# EAGLE board lampuIOT (EAGLE 9.5.2)
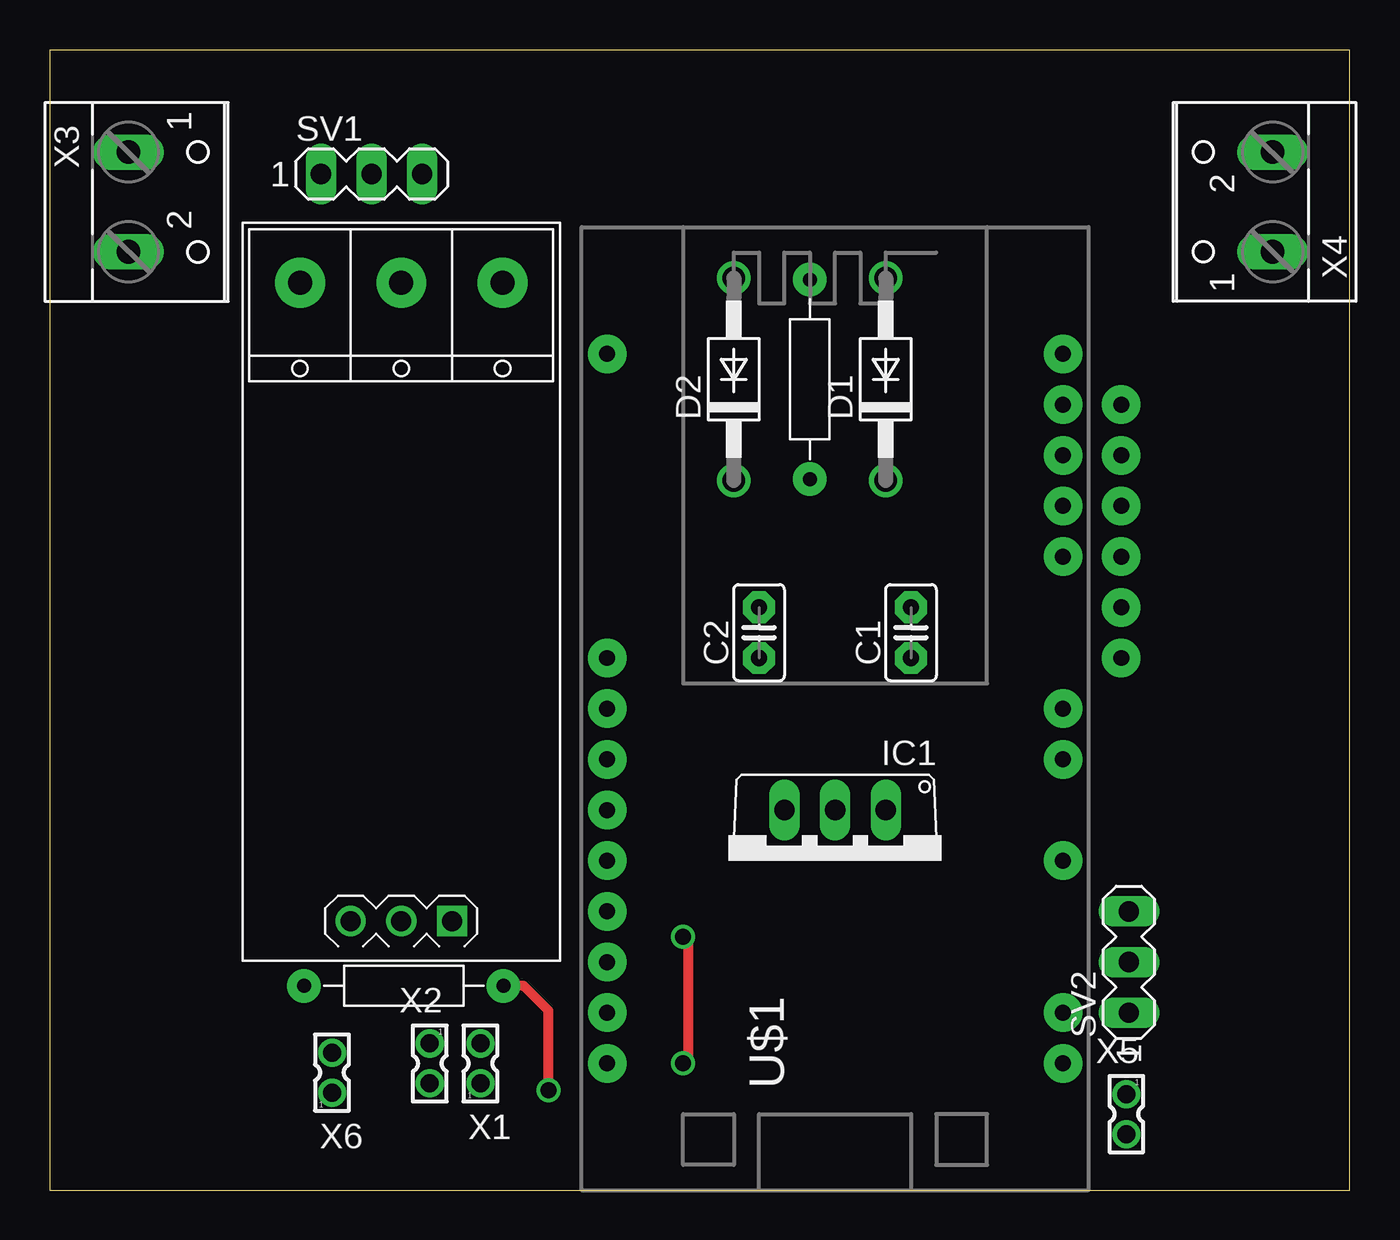
[diagram p0: board, top side]
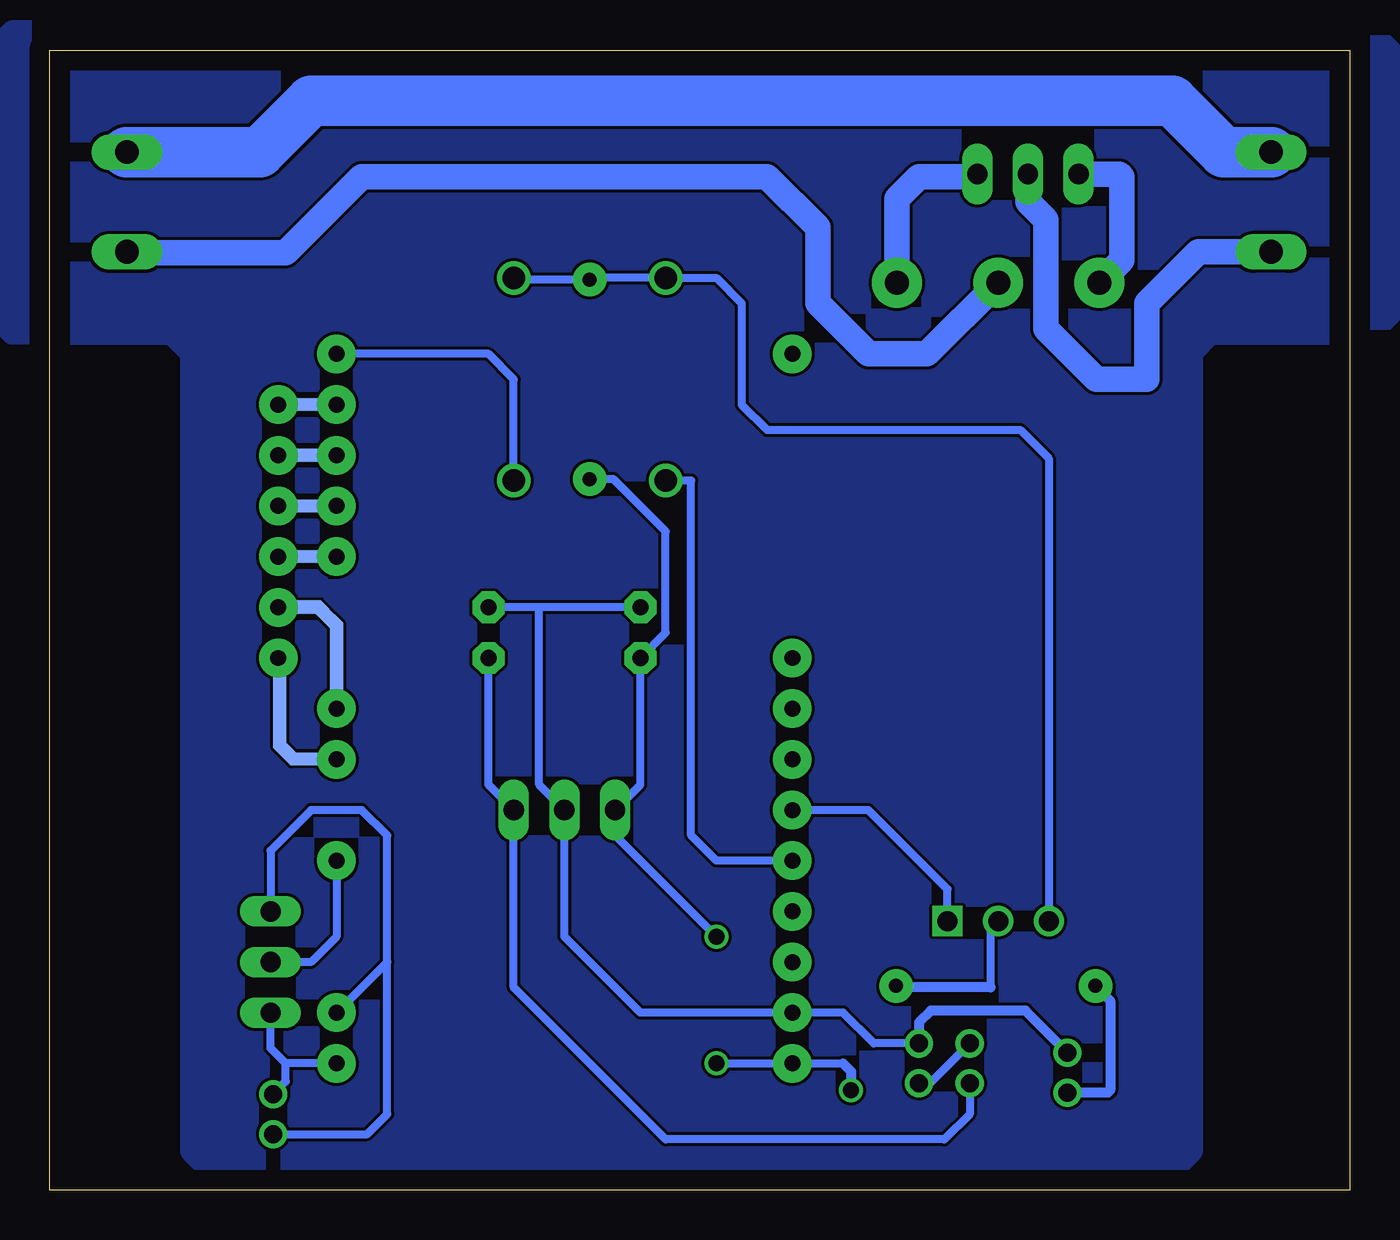
[diagram p1: board, bottom side, seen from below]

Size 65.17 x 57.14 mm. Coordinates in mm from the lower left corner, seen from the top.
Outline: 0,0 65.17,0 65.17,57.14 0,57.14 0,0
Copper layers (1*16): Top 0.035mm / dielectric 1.5mm / Bottom 0.035mm
Design rules "default": minimum track width 6mil, minimum drill 0.35mm, track to track 6mil, track to pad 6mil, pad to pad 6mil, via to via 6mil, smd to smd 6mil, copper to edge 40mil, drill to drill 6mil, minimum pad ring 10mil, minimum via ring 8mil, stop-mask expansion 4mil, vias tented up to drill 0mil, thermal gap 10mil

## Footprints (pad centres in the part's own frame; a part is rotated, then mirrored left to right if it is on the bottom)
C2.5-2 = drill 0.813 pad 1.6 octagon: 1 -1.27,0; 2 1.27,0
DO41-10 = drill 1.118: A 5.08,0; C -5.08,0
TO220V = drill 1.016 long: 1 -2.54,-2.54; 2 0,-2.54; 3 2.54,-2.54
RESISTOR = drill 0.7 pad 1.676: P$1 5,0; P$2 -5,0
RELAY1CH = drill 1 square: J1.1 -14.2,-2.89 | drill 1: J1.2 -14.2,-0.35; J1.3 -14.2,2.19 | drill 1.2 pad 2.5: P1.1 17.8,-5.43; P1.2 17.8,-0.35; P1.3 17.8,4.73
MA03-1 = drill 1.016 long: 1 -2.54,0; 2 0,0; 3 2.54,0
ESP12E_DEVKIT = drill 0.8 pad 1.93: 3V3@0 -11.43,-7.62; 3V3@2 11.43,-17.78; 3V3@3 14.351,5.08; AD0 -11.43,17.78; CLK -11.43,-2.54; CMD -11.43,2.54; D0 11.43,17.78; D1 11.43,15.24; D2 11.43,12.7; D3 11.43,10.16; D4 11.43,7.62; D5 11.43,0; D6 11.43,-2.54; D8 11.43,-7.62; D9 14.351,15.24; D10 14.351,12.7; D11 14.351,10.16; D12 14.351,7.62; EN -11.43,-10.16; GND@0 -11.43,-5.08; GND@1 -11.43,-15.24; GND@3 11.43,-15.24; GND@4 14.351,2.54; RST -11.43,-12.7; SD0 -11.43,0; VIN -11.43,-17.78 | smd 1.27 x 0.635 bottom: P$2 12.7,15.24; P$3 12.7,12.7; P$4 12.7,10.16; P$5 12.7,7.62; P$7 13.97,15.24; P$8 13.97,12.7; P$9 13.97,10.16; P$10 13.97,7.62; P$14 13.26,5.08; P$16 12.89,5.08; P$19 12.87,5.11; P$20 13.36,5.11; P$21 11.82,-2.53; P$22 13.06,-2.53 | smd 0.635 x 1.27 bottom: P$11 11.42,1.18; P$12 11.42,2.41; P$13 11.42,3.65; P$24 14.28,-1.32; P$25 14.28,-0.05; P$26 14.28,1.22 | smd 1.27 x 0.635 rotated 45 bottom: P$15 11.78,4.52; P$17 11.77,4.51; P$18 12.01,4.75; P$23 13.92,-2.18
332-02 = drill 0.9 pad 1.27: 1 0,-1; 2 0,1
W237-102 = drill 1.194 long: 1 -2.5,-1.27; 2 2.5,-1.27

## Placement (x,y rotation side)
C1  [C2.5-2]  43.18,27.94 90 top
C2  [C2.5-2]  35.56,27.94 90 top
D1  1N4004  [DO41-10]  41.91,40.64 90 top
D2  1N4004  [DO41-10]  34.29,40.64 90 top
IC1  7805TV  [TO220V]  39.37,16.51 180 top
R  RESISTOR  [RESISTOR]  38.1,40.64 270 top
R1  RESISTOR  [RESISTOR]  17.75,10.24 0 top
RELAY  RELAY1CH  [RELAY1CH]  17.27,27.69 90 top
SV1  [MA03-1]  16.13,50.93 0 top
SV2  [MA03-1]  54.1,11.43 90 top
U$1  ESP12E_DEVKIT  [ESP12E_DEVKIT]  39.37,24.13 0 top
X1  332-02  [332-02]  21.59,6.35 0 top
X2  332-02  [332-02]  19.05,6.35 180 top
X3  [W237-102]  5.21,49.53 270 top
X4  [W237-102]  60.04,49.53 90 top
X5  332-02  [332-02]  53.98,3.81 180 top
X6  332-02  [332-02]  14.14,5.89 0 top

## Library data of the parts
C1 C2 = capacitor-wima
D1 D2 = diode
IC1 = linear
R R1 = resistor
RELAY = nodemcu_lolin
SV1 SV2 = con-lstb; OC_FARNELL: unknown; OC_NEWARK: unknown
U$1 = node_lampuIOT
X1 X2 X5 X6 = con-garry
X3 X4 = con-wago-500; MPN: 237-102; OC_FARNELL: unknown; OC_NEWARK: 70K9898

## Nets
3V31: D2.C U$1.3V3@0
3V32: SV2.1 U$1.3V3@2 X5.1
5V: C2.1 IC1.3 R1.P$1 R.P$1 RELAY.J1.2 U$1.VIN
BATTERY: X1.1 X2.1
COM: RELAY.P1.2 X4.1
DHT: SV2.2 U$1.D8
GND: C1.2 C2.2 IC1.2 U$1.GND@1 X1.2 X6.2
GND1: RELAY.J1.1 U$1.GND@0
GND2: SV2.3 U$1.GND@3 X5.2
IN1: D1.C U$1.D0
N$1: X3.1 X4.2
N$2: R1.P$2 X6.1
NC: RELAY.P1.1 SV1.3
NO: RELAY.P1.3 SV1.1
OUT1: D1.A D2.A R.P$2 RELAY.J1.3
OUT2: SV1.2 X3.2
VBAT: C1.1 IC1.1 X2.2

## Tracks (layer width: path | path; a pad name or v marks a point on that pad's centre or on a via)
3V31
  Bottom 0.406: U$1.3V3@0 31.75,16.51 33.02,17.78 33.02,35.56 D2.C
3V32
  Bottom 0.406: U$1.3V3@2 53.34,6.35 | 53.34,6.35 54.1,7.11 SV2.1 | X5.1 53.34,5.45 53.34,6.35
5V  (via drill 0.8)
  Top 0.508: v25,5 25,9 23.76,10.24 R1.P$1 | v31.75,12.7 32,12.45 32,6.6 v31.75,6.35
  Bottom 0.406: R.P$1 36.91,35.64 34.29,33.02 34.29,27.94 C2.1 35.56,20.32 IC1.3 36.83,17.78 v31.75,12.7 | v31.75,6.35 U$1.VIN 25.4,6.35 | RELAY.J1.2 18,13.11 18,10.16
  Bottom 0.508: 18,10.16 22.67,10.16 R1.P$1 | 25.4,6.35 25,5.95 v25,5
A
  pour Bottom: -1,58 -2,57 -2,44 -1,43 7,43 8,42 8,2 11,-1 55,-1 58,2 58,4 58,42 59,43 67,43 68,44 68,45 68,57 67,58
BATTERY
  Bottom 0.406: X2.1 21.05,5.35 X1.1
COM
  Bottom 1.27: RELAY.P1.2 21.2,41.91 24.13,41.91 26.67,44.45 26.67,48.26 29.21,50.8 49.53,50.8 53.34,46.99 61.27,46.99 X4.1
DHT
  Bottom 0.406: U$1.D8 50.8,12.7 52.07,11.43 SV2.2
GND
  Bottom 0.406: C2.2 40.64,29.21 | 40.64,29.21 C1.2 | 40.64,29.21 40.64,20.32 IC1.2 39.37,12.7 35.56,8.89 U$1.GND@1 25.4,8.89 23.86,7.35 X1.2
  Bottom 0.508: X6.2 16.25,9 21,9 21.59,8.41 X1.2
GND1
  Bottom 0.406: RELAY.J1.1 20.16,15.08 24.13,19.05 U$1.GND@0
GND2
  Bottom 0.406: U$1.GND@3 48.26,11.43 | 48.26,11.43 48.26,17.78 49.53,19.05 52.07,19.05 54.1,17.02 SV2.3 | X5.2 49.26,2.81 48.26,3.81 48.26,11.43
IN1
  Bottom 0.406: U$1.D0 43.18,41.91 41.91,40.64 D1.C
N$1
  Bottom 2.54: X3.1 6.31,52.03 8.89,54.61 52.07,54.61 54.65,52.03 X4.2
N$2
  Bottom 0.508: R1.P$2 12,9.49 12,5 12.11,4.89 X6.1
NC
  Bottom 1.27: RELAY.P1.1 22.7,49.69 21.59,50.8 18.8,50.8 SV1.3
NO
  Bottom 1.27: RELAY.P1.3 11.43,46.6 11.43,50.8 11.56,50.93 SV1.1
OUT1
  Bottom 0.406: D1.A 41.83,45.64 R.P$2 38.02,45.72 D2.A 31.75,45.72 30.48,44.45 30.48,39.37 29.21,38.1 16.51,38.1 15.08,36.67 RELAY.J1.3
OUT2
  Bottom 1.27: SV1.2 16.13,49.53 15.24,48.64 15.24,43.18 12.7,40.64 10.16,40.64 10.16,44.45 7.58,47.03 X3.2
VBAT
  Bottom 0.406: C1.1 43.18,20.32 IC1.1 41.91,10.16 34.29,2.54 20.32,2.54 19.05,3.81 X2.2